# Altium PCB BRD150118.pcbdoc
Units mm, origin at the board's own origin, x right, y up, seen from the top; angles counter-clockwise.
Board outline 49.74 x 49.74 mm, 2 copper layers (Top Layer, Bottom Layer), stack 1.571 mm thick; 34 components, 26 nets, 86 pads, 25 vias.
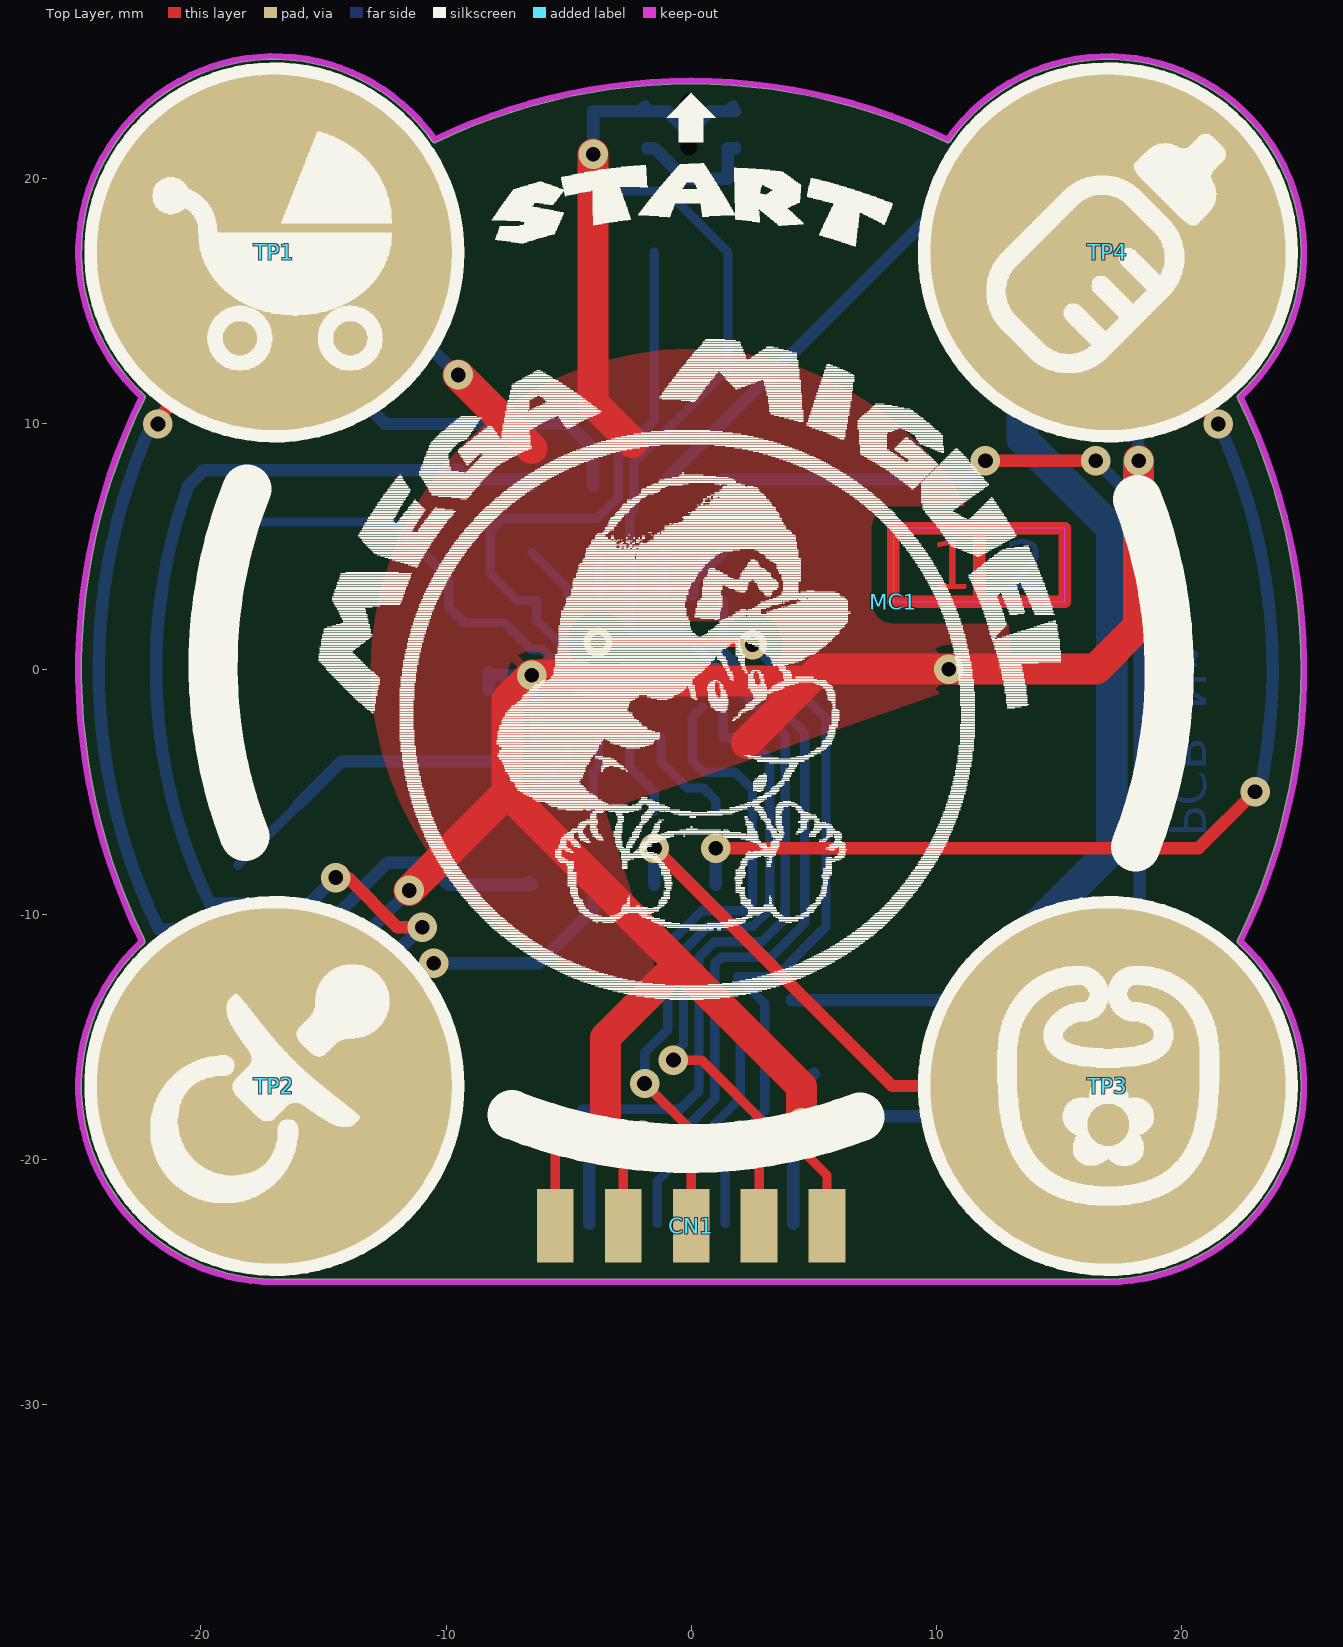
[diagram p0: Top Layer view]
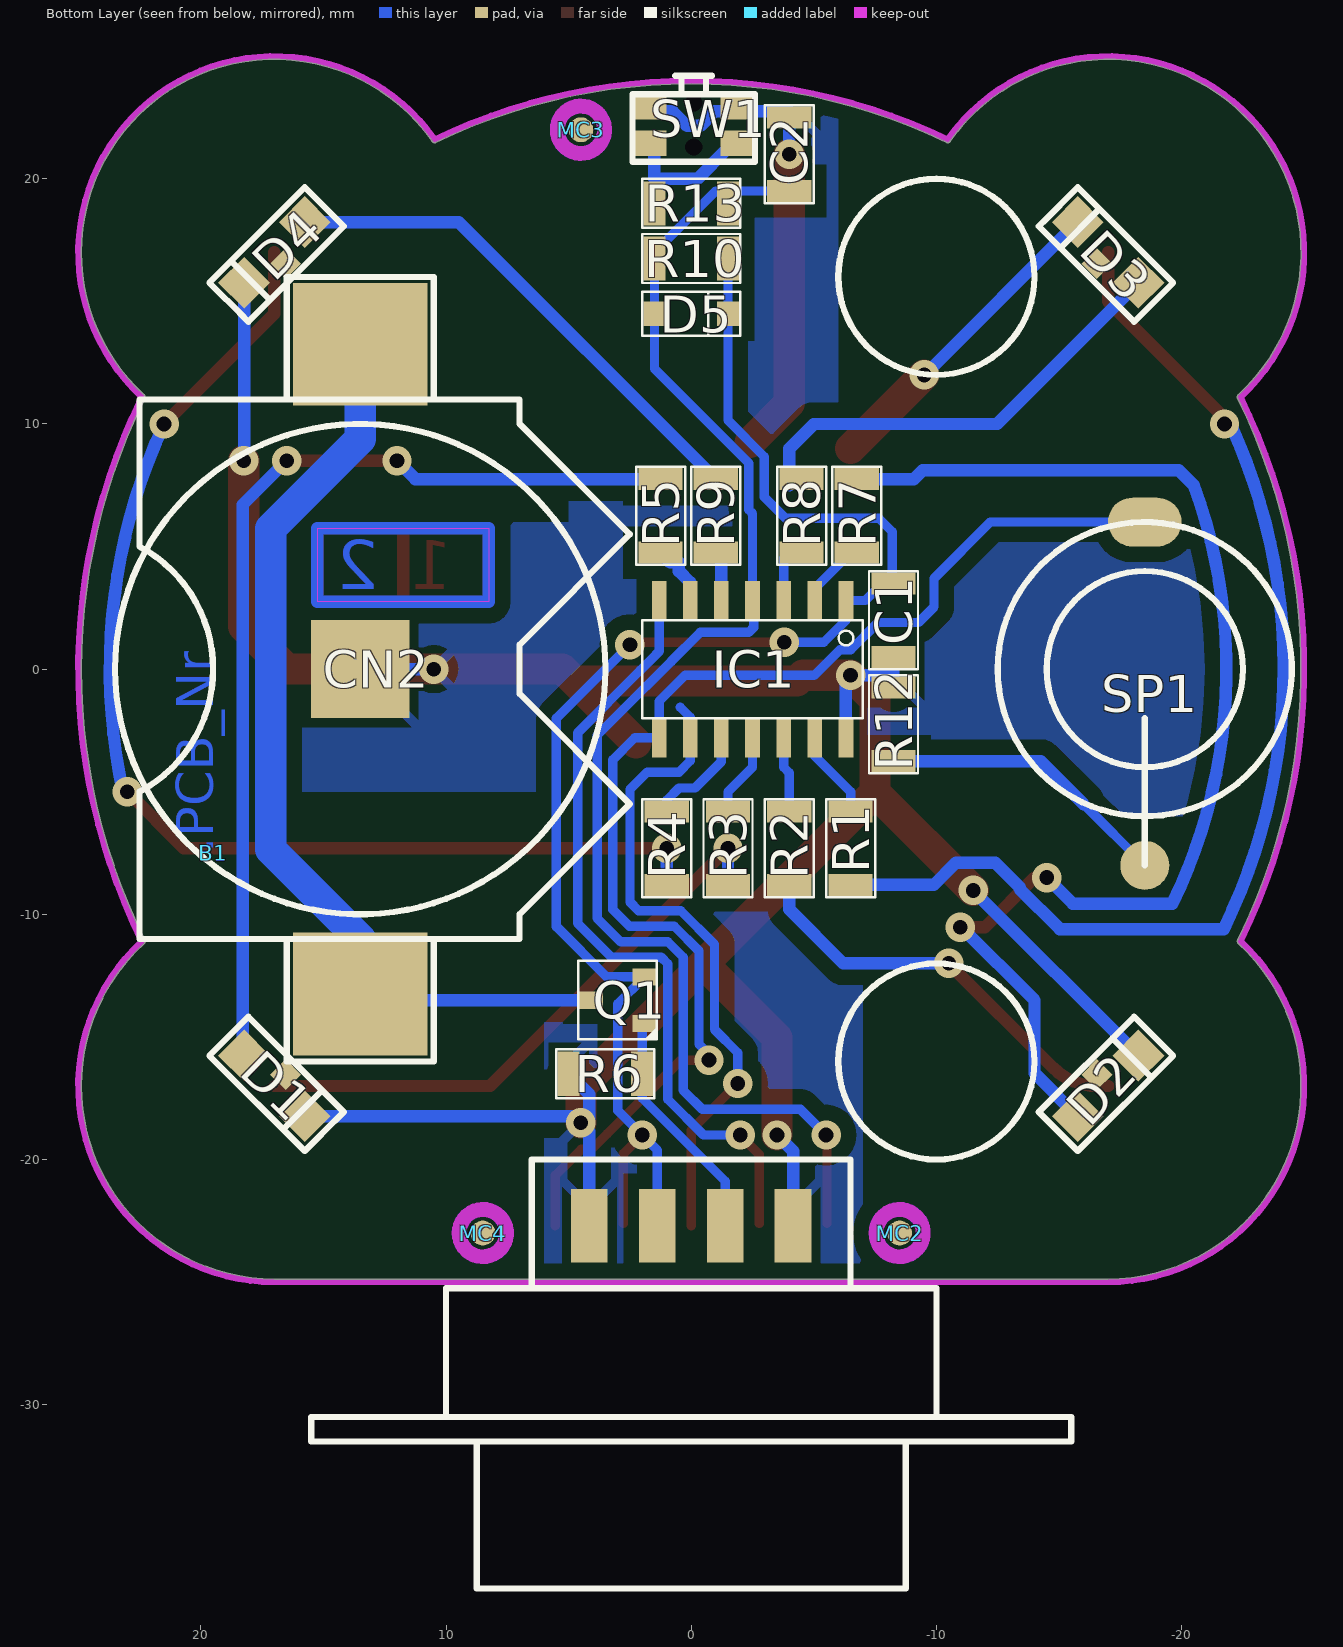
[diagram p1: Bottom Layer view, seen from below]
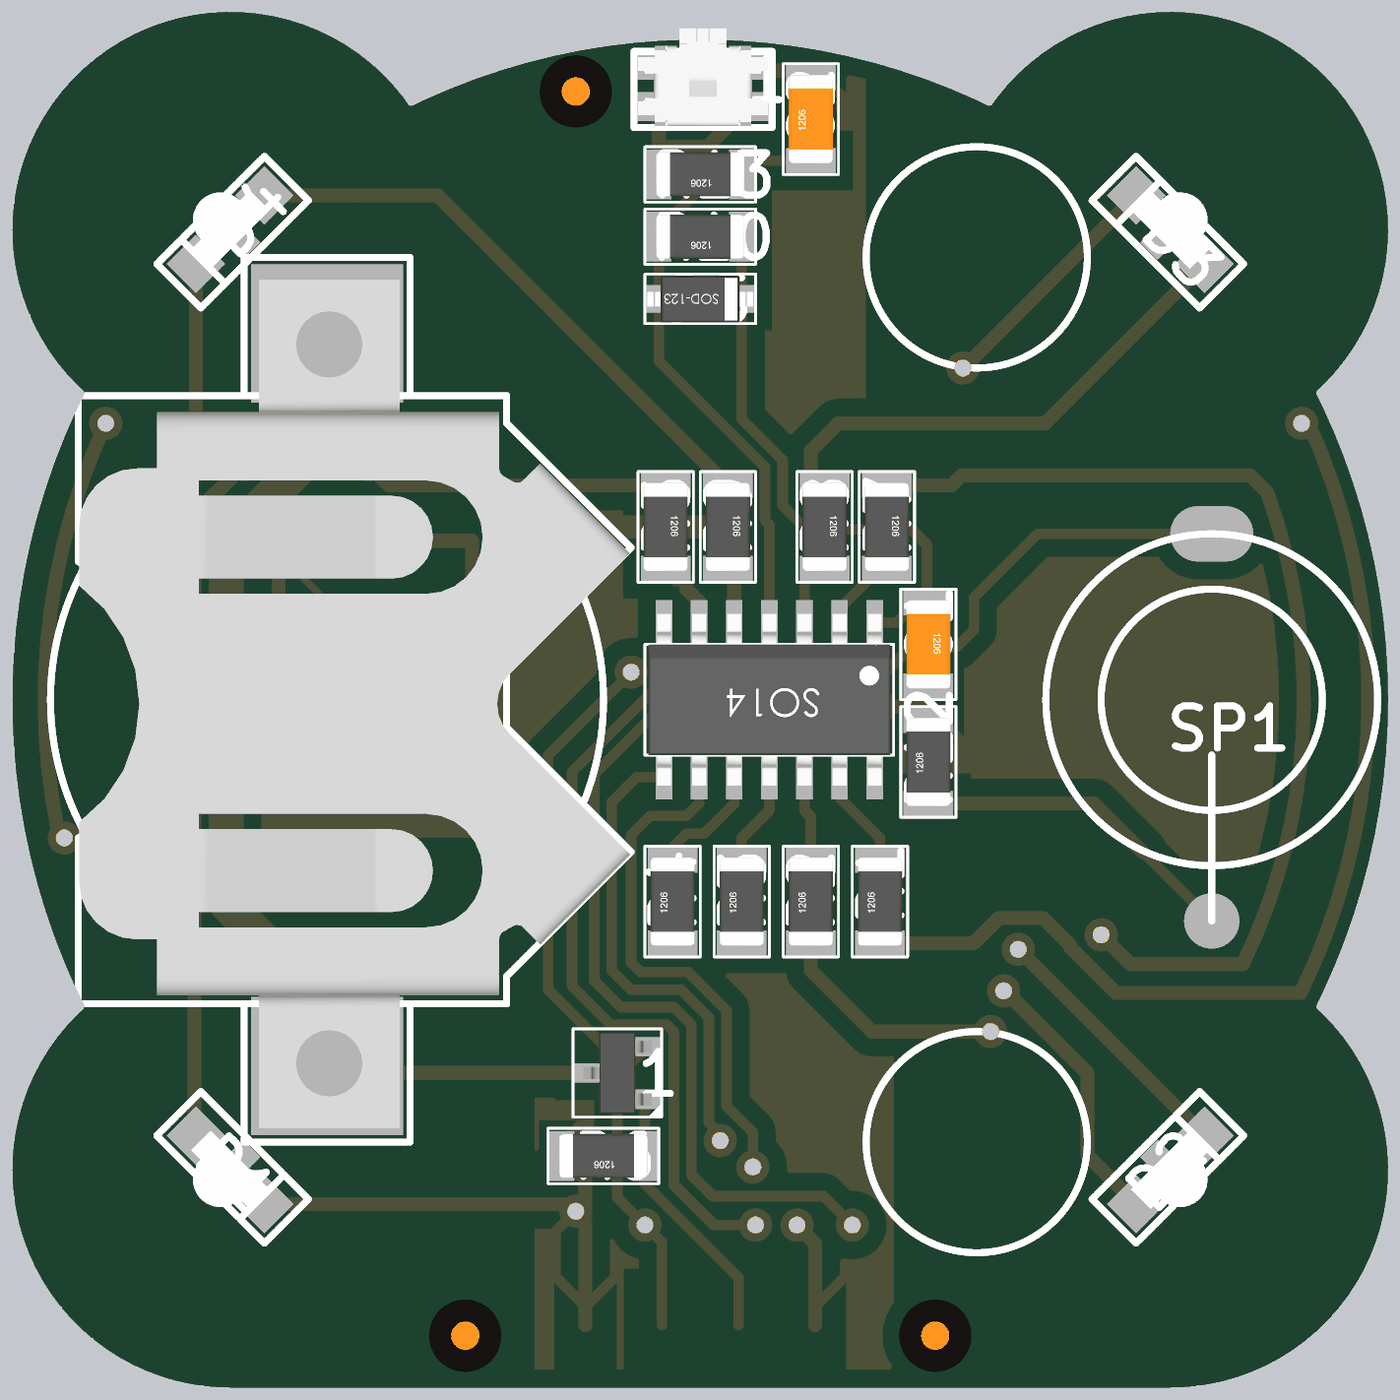
[diagram p2: 3D render of the assembled board from below, using the file's embedded part models]

## Layer stack, top to bottom
Top Solder: solder mask 0.0102, Solder Resist, Dk 3.5
Top Layer: signal copper 0.0356
Dielectric1: dielectric 1.5, FR-4, Dk 4.8
Bottom Layer: signal copper 0.0356
Bottom Solder: solder mask 0.0102, Solder Resist, Dk 3.5

## Board outline
-22.278,-11.103 ccw(c-22.406,-11.103) -22.316,-11.013 ccw(c-22.443,-11.014) -22.329,-10.958 cw(c0,0) -22.286,11.044 ccw(c-22.401,11.1) -22.273,11.1 ccw(c-22.401,11.1) -22.33,11.207 cw(c-17,17) -10.578,21.553 ccw(c-10.46,21.601) -10.404,21.486 cw(c0,0) 10.406,21.485 ccw(c10.462,21.6) 10.583,21.561 cw(c17,17) 24.873,17 cw(c17,17) 22.32,11.197 ccw(c22.406,11.103) 22.316,11.013 ccw(c22.443,11.014) 22.329,10.958 cw(c0,0) 24.873,0 cw(c0,0) 22.286,-11.044 ccw(c22.401,-11.1) 22.33,-11.207 cw(c17,-17) 24.873,-17 cw(c17,-17) 17,-24.873 ccw(c17,-25) 16.999,-24.873 -17,-24.873 cw(c-17,-17) -22.32,-11.197 ccw(c-22.406,-11.103)

## Design rules (kind name [scope] priority, off if disabled: settings)
Clearance SC_SOT23-6 [HasFootprint('SC_SOT23-6') vs HasFootprint('SC_SOT23-6')] p1: gap=0.229
Clearance Clearance_polygons [InPolygon] p2: gap=0.635
Clearance Clearance_All [All] p3: gap=0.254
HoleSize [All] p1: absolutevalues=TRUE maxlimit=3.2 minlimit=0.6 maxpercent=80.000 minpercent=20.000
MinimumAnnularRing [All] p1: minimumring=0.254
MinimumSolderMaskSliver SilkscreenOverComponentPads [All] p2: minsoldermaskwidth=0.254
PlaneClearance [All] p1: clearance=1.27
PolygonConnect [All] p1: connectstyle=Relief reliefconductorwidth=0.381 reliefentries=4 polygonreliefangle="45 Angle" airgapwidth=0.381
RoutingVias [All] p1: holewidth=0.6 width=1.2 viastyle="Through Hole" minholewidth=0.6 minwidth=1.2 maxholewidth=0.6 maxwidth=1.2
SolderMaskExpansion [All] p1: expansion=0
Width [All] p1: maxlimit=1.27 minlimit=0.381 preferedwidth=0.508
28 further rules are at their usual default settings.

## Components (designator, comment, footprint, x,y, rotation, side; value= is the part's Value field where it differs from the comment)
B1 "BRD150118/1" MC_BoardNr 19.5,-7.5 r90 bottom
C1 "YCAM100N" CA_STD1206_H16 -8.25,2 r270 bottom
C2 "YCAM100N" CA_STD1206_H16 -4,21 r90 bottom
CN1 "A-DF 09 LL/Z" CN_SUBD_9P_FEMALE_EDGE 0,-31.5 r0 top
CN2 "S8211-46R" CN_BAT_CLIP_HARWIN_S8211-46R 13.5,0 r90 bottom
D1 "HSME-C110" DI_AVAGO_HSMx-C680 17,-17 r315 bottom
D2 "HSMC-C680" DI_AVAGO_HSMx-C680 -17,-17 r225 bottom
D3 "HSMA-C110" DI_AVAGO_HSMx-C680 -17,17 r135 bottom
D4 "LTST-S321KSKT" DI_AVAGO_HSMx-C680 17,17 r45 bottom
D5 "YDIOBAT46" DI_SOD123 0,14.5 r180 bottom
IC1 "ATTINY84A-SSU" SC_SO14 -2.5,0 r0 bottom
MC1 "MC_2LAYER_INDICATOR" MC_2LAYER_INDICATOR 8.25,2.75 r0 top
MC2 "Fiducial" MC_FIDUCIAL -8.5,-23 r180 bottom
MC3 "Fiducial" MC_FIDUCIAL 4.5,22 r180 bottom
MC4 "Fiducial" MC_FIDUCIAL 8.5,-23 r180 bottom
Q1 "YTRS2035" SC_SOT23_3P 3,-13.5 r90 bottom
R1 "YRES1K" RE_STD1206_H6 -6.5,-7.3 r270 bottom
R2 "YRES1K" RE_STD1206_H6 -4,-7.3 r270 bottom
R3 "YRES1K" RE_STD1206_H6 -1.5,-7.3 r270 bottom
R4 "YRES1K" RE_STD1206_H6 1,-7.3 r270 bottom
R5 "68E/1%" RE_STD1206_H6 1.25,6.25 r90 bottom
R6 "YRES10K" RE_STD1206_H6 3.5,-16.5 r180 bottom
R7 "68E/1%" RE_STD1206_H6 -6.75,6.25 r90 bottom
R8 "68E/1%" RE_STD1206_H6 -4.5,6.25 r90 bottom
R9 "68E/1%" RE_STD1206_H6 -1,6.25 r90 bottom
R10 "YRES10K" RE_STD1206_H6 0,16.75 r180 bottom
R12 "YRES1K" RE_STD1206_H6 -8.25,-2.25 r270 bottom
R13 "YRES330E" RE_STD1206_H6 0,19 r180 bottom
SP1 "7BB-12-9" LS_MURATA_7BB-12-9 -18.5,0 r180 bottom
SW1 "EVQ-P7C01P" CN_PANASONIC_EVQ-P7 -0.1,22.2 r0 bottom
TP1 "Qtouch" SW_ATMEL_QTOUCH_BUTTON -17,17 r0 top
TP2 "Qtouch" SW_ATMEL_QTOUCH_BUTTON -17,-17 r0 top
TP3 "Qtouch" SW_ATMEL_QTOUCH_BUTTON 17,-17 r0 top
TP4 "Qtouch" SW_ATMEL_QTOUCH_BUTTON 17,17 r0 top

## Footprints (in the part's own frame and the unit in brackets; to place one, negate y for a bottom-side part, rotate by r counter-clockwise, add the part's x,y. Pads: shape width x height; smd on the part's side, far side on the other; paste and mask are expansions set on the pad)
CA_STD1206_H16 [mm] "CA_1206"
  rect 0.9x1.8 smd: 1(-1.5,0) 2(1.5,0)
  silkscreen extent -2,-1 2,1, body extent -1.6,-0.8 1.6,0.8, height 1
CN_BAT_CLIP_HARWIN_S8211-46R [mm]
  rect 5x5.5 smd: 1(-13.25,0) 1(13.25,0)
  rect 4x4 smd: 2(0,0)
  silkscreen extent -16,-11 16,10, body extent -15.5,-10.97 15.2,8.97, height 4
CN_PANASONIC_EVQ-P7 [mm]
  rect 1.4x1.05 smd: 1(-1.8,0.75) 1(1.8,0.75) 2(-1.8,-0.75) 2(1.8,-0.75)
  round 0 hole 0.7 unplated: 3(0,-0.9) 3(0,0.9)
  silkscreen extent -2.5,-2 2.5,1.5, body extent -2.35,-2.1 2.35,1.45, height 1.35
CN_SUBD_9P_FEMALE_EDGE [mm]
  rect 1.5x3 smd: 1(5.54,8.8) 2(2.77,8.8) 3(0,8.8) 4(-2.77,8.8) 5(-5.54,8.8)
  rect 1.5x3 smd far side: 6(4.155,8.8) 7(1.385,8.8) 8(-1.385,8.8) 9(-4.155,8.8)
  body extent -15.4,-6 15.41,9.65, height 5.62
DI_AVAGO_HSMx-C680 [mm]
  rect 0.9x0.9 smd: 3(-0.65,0)
  rect 1.5x1.5 smd: A(0,-1.75) C(0,1.75)
  silkscreen extent -1.25,-2.75 1,2.75, body extent -1.1,-2.5 1.5,2.5, height 1
DI_SOD123 [mm] "Standard SOD123 package"
  rect 0.9x1 smd: A(-1.5,0) C(1.5,0)
  silkscreen extent -2,-0.9 2,0.9, body extent -1.93,-0.86 1.92,0.84, height 1.47
LS_MURATA_7BB-12-9 [mm]
  oval 3x2 smd: 1(0,6)
  round 2 smd: 2(0,-8)
  silkscreen extent -6,-8 6,6, body extent -5.99,-6 6,6, height 0.22
MC_2LAYER_INDICATOR [mm] "2 layer indicator"
  Top Layer lines w0.508: 3.5,0 3.5,3 ; 0,0 0,3 6.985,3 6.985,0 0,0
  Bottom Layer lines w0.508: 6.985,0 0,0 ; 6.985,3 0,3 ; 7,0 7,3 ; 0,0 0,3 ; 0,0 0,3
  Keep-Out Layer region: 0,0 6.985,0 6.985,3 0,3
MC_BoardNr [mm] "Board number"
MC_FIDUCIAL [mil] "Fiducial"
  round 40 smd paste-3937.01 mask+31.5: 0(0,0)
  Top Layer keep-out circle w24: c0,0 r38
RE_STD1206_H6 [mm] "RE_1206"
  rect 0.9x1.8 smd: 1(-1.5,0) 2(1.5,0)
  silkscreen extent -2,-1 2,1, body extent -1.6,-0.8 1.6,0.8, height 1.02
SC_SO14 [mm] "IC_SO14"
  rect 0.6x1.6 smd: 1(-3.81,-2.8) 2(-2.54,-2.8) 3(-1.27,-2.8) 4(0,-2.8) 5(1.27,-2.8) 6(2.54,-2.8) 7(3.81,-2.8) 8(3.81,2.8) 9(2.54,2.8) 10(1.27,2.8) 11(0,2.8) 12(-1.27,2.8) 13(-2.54,2.8) 14(-3.81,2.8)
  silkscreen extent -4.5,-2 4.5,2, body extent -4.37,-3.1 4.38,3.1, height 1.77
SC_SOT23_3P [mm] "TR_SOT23_V312"
  rect 0.7x1 smd: 1(-0.95,-1.1) 2(0.95,-1.1) 3(0,1.1)
  silkscreen extent -1.6,-1.6 1.6,1.6, body extent -1.46,-1.25 1.46,1.23, height 1.04
SW_ATMEL_QTOUCH_BUTTON [mm]
  round 15 smd: 1(0,0)
  silkscreen extent -7.5,-7.5 7.5,7.5

## Part data
B1: library part pcb_nr
C1 C2: "100N"
CN1: "Edge mount Connector"
CN2: "Coin cell holder CR2032"
D1: "GREEN"
D2: "RED"
D3: "AMBER"
D4: "YELLOW"
D5: "BAT46"
Q1: "DMP2035"
R1 R2 R3 R4 R12: "1K"
R5 R7 R8 R9: "68E"
R6 R10: "10K"
R13: "330E"
SP1: "12mm piezo"
TP1 TP2 TP3 TP4: library part QtouchButton

## Via types
v1: diameter 1.2, hole 0.6, Top Layer to Bottom Layer, tented both sides, 25 vias

## Nets (pads, with @x,y where several pads share a name; then routed paths per layer and width w, separated by ;. In a path a pad name is that pad's centre, name@x,y a point inside that pad or via, vN(x,y) a via of type N, cw(c..) or ccw(c..) an arc to the next point about the centre after c; other vN are vias at no path point)
/EN_BAT: CN1.8 Q1.1 R6.2 | length 9.6
  Bottom Layer w0.381: CN1.8@-1.385,-22.61 -1.385,-20.885 2,-17.5 R6.2 2,-14.55 Q1.1
/RESET: C2.1 CN1.5 D5.A IC1.4 R10.1 R13.2 | length 58.7
  Top Layer w0.381: CN1.5@-5.54,-22.61 -5.54,-19.04 v1(-5.5,-19)
  Bottom Layer w0.381: v1(-5.5,-19) -4.455,-17.955 -0.455,-17.955 0.32,-17.18 0.32,-15.247 0.32,-11.753 0.953,-11.12 2.88,-11.12 3.835,-10.165 3.835,-2.698 1.816,-0.68 1.804,-0.68 0.82,0.304 0.82,0.316 -0.363,1.5 -2.344,1.5 -2.544,1.7 -2.544,2.756 IC1.4 ; C2.1 -1,19.5 1.5,17 D5.A 1.5,12.25 -2.345,8.406 -2.345,6.5 -2.5,6.345 IC1.4@-2.5,3.05
GND: C1.2 C2.2 CN1.6 CN1.9 CN2.2 D1.C D2.C D3.C D4.C IC1.14 R6.1 R12.1 SW1.2 | length 154.7
  Top Layer w1.27: v1(-11.5,-9.025) -7.5,-5.025 ; v1(-9.5,12) -6.5,9 ; v1(-4,21) -4,10.852 -2.398,9.25 ; v1(-3.5,-19) -3.5,-15.025 -0.5,-12.025 ; 2.25,-3 4.761,-0.489 ; v1(4.5,-18.5) 4.5,-17.025 -0.5,-12.025 ; v1(18.25,8.5) 18.25,1.75 16.5,0 v1(10.5,0) 5.25,0 4.761,-0.489 ; -7.5,-5.025 -0.5,-12.025 ; -7.5,-5.025 -7.5,-1.25 v1(-6.5,-0.25) -4.556,-0.25 -4.317,-0.489 4.761,-0.489
  Bottom Layer w0.508: D2.C v1(-11.5,-9.025) ; D3.C -9.525,12 v1(-9.5,12) ; R12.1@-8.25,-0.86 R12.1 -8.25,-0.125 -8.125,-0.25 v1(-6.5,-0.25) -6.31,-0.44 IC1.14 ; CN1.9@-4.155,-22.61 -4.155,-19.655 v1(-3.5,-19) ; v1(-4,21) C2.2 -4,22.75 SW1.2@-1.7,22.75 ; SW1.2@-1.9,22.95 SW1.2@-1.7,22.75 ; SW1.2@1.7,22.95 1.7,22.85 1.8,22.75 0.758,22.75 0.758,22.745 0.171,22.158 -0.371,22.158 -0.958,22.745 -0.958,22.75 SW1.2@-1.7,22.75 ; CN1.6@4.155,-22.61 4.155,-18.845 v1(4.5,-18.5) ; R6.1 4.155,-17.345 4.155,-18.345 4.31,-18.5 v1(4.5,-18.5) ; v1(10.5,0) CN2.2 ; D1.C 4.763,-18.237 v1(4.5,-18.5) ; D4.C 18.237,8.513 v1(18.25,8.5)
MISO: CN1.1 IC1.8 SP1.1 | length 52.5
  Top Layer w0.381: v1(-0.724,-15.944) 0.422,-15.944 3.42,-18.943 3.42,-18.947 4.053,-19.579 4.479,-19.579 5.54,-20.64 CN1.1
  Bottom Layer w0.381: SP1.1 -12.2,6 -9.9,3.7 -9.9,2.54 -9.265,1.905 -7.62,1.905 -6.51,0.795 -6.067,0.795 -5.023,-0.25 0.25,-0.25 1.31,-1.31 IC1.8 2.3,-2.8 3.2,-3.7 3.2,-9.8 2.515,-10.485 0.69,-10.485 -0.315,-11.49 -0.315,-15.3 -0.724,-15.709 v1(-0.724,-15.944)
MOSI: CN1.4 IC1.7 | length 31.9
  Top Layer w0.381: CN1.4@-2.77,-22.61 -2.77,-19.797 -2,-19.027 v1(-2,-19)
  Bottom Layer w0.381: v1(-2,-19) -0.5,-19 0.955,-17.545 0.955,-14.984 0.955,-12.016 1.216,-11.755 3.245,-11.755 4.635,-10.365 4.635,-2.6 2.079,-0.045 2.067,-0.045 1.455,0.567 1.455,0.579 1.31,0.725 IC1.7
NetCN2_1: CN2.1 Q1.3 | length 39
  Bottom Layer w0.508: Q1.3 13.25,-13.5 CN2.1@13.5,-13.25
  Bottom Layer w1.27: CN2.1@13.5,-13.25 13.5,-11 17.151,-7.349 17.151,5.743 13.5,9.394 CN2.1@13.5,13.25
NetD1_A: D1.A R5.2 | length 40.6
  Top Layer w0.508: v1(12,8.5) v1(16.5,8.5)
  Bottom Layer w0.508: R5.2 11.25,7.75 v1(12,8.5) ; v1(16.5,8.5) 18.294,6.706 18.294,-15.706 D1.A
NetD2_A: D2.A R7.2 | length 51.6
  Top Layer w0.508: v1(-14.5,-8.5) -14,-8.5 -11.972,-10.528 v1(-10.972,-10.528)
  Bottom Layer w0.508: D2.A -14,-16.475 -14,-13.5 -11.028,-10.528 v1(-10.972,-10.528) ; v1(-14.5,-8.5) -15.56,-9.56 -19.624,-9.56 cw(c0,0) -20.5,7.5 -19.892,8.108 -9.44,8.108 -9.082,7.75 R7.2 ; R7.2@-6.75,7.508 R7.2@-6.5,7.508 ; R7.2@-6.5,7.75 R7.2@-6.5,7.758
NetD3_A: D3.A R8.2 | length 18.5
  Bottom Layer w0.508: D3.A -12.475,10 -5,10 -4,9 R8.2@-4,7.5
NetD4_A: D4.A R9.2 | length 21.1
  Bottom Layer w0.508: R9.2 9.487,18.237 D4.A
NetIC1_2: IC1.2 R7.1 | length 2.3
  Bottom Layer w0.381: R7.1@-6.5,4.75 -5.04,3.29 IC1.2@-5.04,3.05
NetIC1_3: IC1.3 R8.1 | length 1.8
  Bottom Layer w0.381: R8.1@-4,4.75 -3.77,4.52 IC1.3@-3.77,3.05
NetIC1_5: IC1.5 R9.1 | length 1.8
  Bottom Layer w0.508: IC1.5@-1.23,3.05 -1.23,4.52 R9.1
NetIC1_6: IC1.6 R5.1 | length 2.4
  Bottom Layer w0.508: IC1.6@0.04,3.05 0.04,3.54 0.502,4.002 0.502,4.358 0.858,4.358 R5.1
NetIC1_10: IC1.10 R4.1 | length 4.3
  Bottom Layer w0.381: IC1.10 -1.23,-3.77 -0.155,-4.845 0.5,-4.845 1,-5.345 R4.1
NetIC1_11: IC1.11 R3.1 | length 3.4
  Bottom Layer w0.381: IC1.11 -2.5,-4 -1.5,-5 R3.1
NetIC1_12: IC1.12 R2.1 | length 3.4
  Bottom Layer w0.381: R2.1@-3.77,-5.57 R2.1 -4,-4.23 -3.77,-4 IC1.12
NetIC1_13: IC1.13 R1.1 | length 3.6
  Bottom Layer w0.381: R1.1 -6.5,-5 -5.04,-3.54 IC1.13
NetR1_2: R1.2 TP1.1 | length 47.2
  Top Layer w0.508: v1(-21.75,10) -21.75,10.25 -17,15 TP1.1
  Bottom Layer w0.508: v1@-22,10 ccw(c0,0) -21.715,-10.605 -15.038,-10.605 -13.392,-8.959 -13.392,-8.892 -12.392,-7.892 -10.8,-7.892 -9.892,-8.8 R1.2 R1.2@-6.608,-8.692
NetR2_2: R2.2 TP2.1 | length 16.9
  Top Layer w0.508: TP2.1 -16.552,-17 ccw(c-16.552,-14.46) -14.756,-16.256 v1(-10.5,-12)
  Bottom Layer w0.508: v1(-10.5,-12) -6.2,-12 -4,-9.8 R2.2
NetR3_2: R3.2 TP3.1 | length 24
  Top Layer w0.508: v1(-1.5,-7.3) 8.2,-17 TP3.1
  Bottom Layer w0.508: R3.2 v1(-1.5,-7.3)
NetR4_2: R4.2 TP4.1 | length 48.7
  Top Layer w0.508: v1(1,-7.3) 20.7,-7.3 v1(23,-5) ; TP4.1 17,14.5 v1(21.5,10)
  Bottom Layer w0.508: R4.2 v1@1,-7.3 ; v1(21.5,10) cw(c0,0) v1@23.171,-5.037
NetR12_2: R12.2 SP1.2 | length 12
  Bottom Layer w0.381: SP1.2 -16,-5.5
  Bottom Layer w0.508: -16,-5.5 -14.25,-3.75 R12.2
NetR13_1: R13.1 SW1.1 | length 5.4
  Bottom Layer w0.508: SW1.1@-1.8,21.25 -1.5,21.25 -0.25,20 1.5,20 1.5,21.25 SW1.1@1.8,21.25
SCK: CN1.3 IC1.9 | length 26.7
  Top Layer w0.381: v1(-1.9,-16.9) 0,-18.8 CN1.3
  Bottom Layer w0.381: v1(-1.9,-16.9) -1.9,-15.643 -0.95,-14.693 -0.95,-11.227 0.427,-9.85 2.15,-9.85 2.5,-9.5 2.5,-4.9 1.8,-4.2 0.5,-4.2 0.04,-3.74 IC1.9 0.04,-1.96 0.445,-1.555
VCC: C1.1 CN1.2 CN1.7 D5.C IC1.1 Q1.2 R10.2 | length 62.8
  Top Layer w0.381: v1(-3.8,1.1) 2.4,1.1 v1(2.5,1) ; v1(2,-19) 2.77,-19.77 CN1.2@2.77,-22.61
  Bottom Layer w0.381: v1(-3.8,1.1) -5.41,1.1 -6.31,2 IC1.1 -7.1,2.8 -8.2,3.9 -8.2,5.6 -7.644,6.155 -3.844,6.155 -2.98,7.02 -2.98,8.669 -1.5,10.148 D5.C R10.2@-1.5,17 ; CN1.7@1.385,-22.61 1.385,-19.615 v1(2,-19) 3,-18 3,-13.65 Q1.2 3.45,-12.55 5.5,-10.5 5.5,-2 v1(2.5,1)
pads on no net: D1.3 D2.3 D3.3 D4.3 MC2.0 MC3.0 MC4.0 SW1.3

## Polygon pours and split planes (outlines as drawn)
GND on Bottom Layer "Top Layer-No Net" (solid, remove dead copper, pour order 2): -6,24 -6,6 -25,6 -25,-6 -7,-6 -7,-25 -6,-25 6,-25 6,-5 25,-5 25,6 5,6 5,24
GND on Top Layer "Top Layer-No Net" (solid, pour order 6): -1.204,-13.004 cw(c0,0) 13.06,0 -3.5,-5.75

## Keep-outs
Keep-Out Layer:
  lines w0.254: -22.443,-11.014 cw(c0,0) -22.401,11.1 ; -22.406,-11.103 ccw(c-17,-17) -17,-25 17,-25 ccw(c17,-17) 22.406,-11.103 ; -22.406,11.103 cw(c-17,17) -10.469,21.62 ; -10.46,21.601 cw(c0,0) 10.462,21.6 ; 10.477,21.632 cw(c17,17) 22.406,11.103 ; 22.401,-11.1 ccw(c0,0) 22.443,11.014

## Silkscreen, mask and mechanical layers (free items; w line width, h text height)
Top Overlay:
  drawing of 7469 lines, arcs and shapes, not listed
Bottom Overlay:
  circle w0.254: c-10,-16 r4
  circle w0.254: c-10,16 r4
Mechanical 4:
  lines w0.127: -89.92,-95 -95,-95 ; -59.44,45.97 -89.92,45.97 ; -46.74,-95 -46.74,-89.92 ; -46.74,45.97 -46.74,51.05 ; -21.34,-82.275 92.96,-82.275 ; -21.34,-74.655 92.96,-74.655 ; -21.34,-67.035 16.76,-67.035 ; 1.52,-95 1.52,-89.92 ; 1.52,45.97 1.52,51.05 ; 16.76,-89.895 16.76,-74.655 16.76,-59.415 ; 49.78,-95 49.78,-89.92 ; 49.78,45.97 49.78,51.05 ; 70.1,-89.895 70.1,-74.655 ; 92.96,-95 98.04,-95 ; -95,-95 98.04,-95 ; -95,-95 -95,51.05 98.04,51.05 98.04,-95 ; -89.92,45.97 92.96,45.97 92.96,-89.92 -89.92,-89.92 -89.92,45.97 ; -21.34,-89.895 -21.34,-59.415 ; -21.34,-89.895 92.96,-89.895 92.96,-59.415 16.76,-59.415 ; -21.34,-89.895 -56.9,-89.895 -56.9,-59.415 -21.34,-59.415 ; -21.34,-59.415 16.76,-59.415 ; -95,-21.975 -89.92,-21.975 -95,-21.975 ; 92.96,-21.975 98.04,-21.975 92.96,-21.975
  text "A" at 73.529,48.993 h1.78 r90
  text "D" at -69.981,47.723 h1.78 r270
  text "C" at -22.356,47.723 h1.78 r270
  text "B" at 23.364,47.723 h1.78 r270
  text "2" at -91.571,15.338 h1.78 r90
  text "2" at 96.389,15.338 h1.78 r90
  text "1" at -91.571,-57.687 h1.78 r90
  text "1" at 96.389,-57.687 h1.78 r90
  text "ENGINEER:" at -20.07,-61.955 h1.14
  text "TITLE:" at 18.03,-61.955 h1.14
  text ".ProjectName" at 24.38,-68.762 h2.5
  text "PCB DESIGNER:" at -20.07,-69.448 h1.14
  text ".DrawnByX" at -7.243,-72.419 h2.5
  text "DATE:" at -20.07,-77.195 h1.14
  text "PART NO.:" at 18.03,-77.195 h1.14
  text "REV:" at 71.37,-77.195 h1.14
  text ".PRINT_DATE" at -18.8,-80.243 h1.78
  text ".RevisionNR" at 71.421,-80.573 h2.5
  text "FILE NAME:" at -20.07,-84.815 h1.14
  text "DWG NO:" at 18.03,-84.815 h1.14
  text "SCALE:" at 71.37,-84.815 h1.14
  text ".PCB_Nr" at 26.996,-87.253 h2.5
  text ".PCB_FILE_NAME_NO_PATH" at -18.8,-87.863 h1.78
  text "D" at -72.978,-93.095 h1.78 r270
  text "C" at -24.972,-93.095 h1.78 r270
  text "B" at 23.542,-93.095 h1.78 r270
  text "A" at 71.599,-93.095 h1.78 r270
Mechanical 5:
  lines w0.127: -89.92,-95 -95,-95 ; -89.92,-82.275 24.38,-82.275 ; -89.92,-74.655 24.38,-74.655 ; -67.06,-89.895 -67.06,-74.655 ; -46.74,-95 -46.74,-89.92 ; -46.74,45.97 -46.74,51.05 ; -13.72,-89.895 -13.72,-74.655 -13.72,-59.415 ; -13.72,-67.035 24.38,-67.035 ; 1.52,-95 1.52,-89.92 ; 1.52,45.97 1.52,51.05 ; 49.78,-95 49.78,-89.92 ; 49.78,45.97 49.78,51.05 ; 62.48,45.97 92.96,45.97 ; 92.96,-95 98.04,-95 ; -95,-95 98.04,-95 ; -95,-95 -95,51.05 98.04,51.05 98.04,-95 ; -13.72,-59.415 -89.92,-59.415 -89.92,-89.895 24.38,-89.895 ; -13.72,-59.415 24.38,-59.415 ; 24.38,-89.895 24.38,-59.415 ; 24.38,-89.895 59.94,-89.895 59.94,-59.415 24.38,-59.415 ; 92.96,45.97 -89.92,45.97 -89.92,-89.92 92.96,-89.92 92.96,45.97 ; -95,-21.975 -89.92,-21.975 -95,-21.975 ; 92.96,-21.975 98.04,-21.975 92.96,-21.975
  text "A" at -69.981,48.993 h1.78 r270
  text "B" at -22.356,48.993 h1.78 r270
  text "C" at 23.364,48.993 h1.78 r270
  text "D" at 71.624,48.993 h1.78 r270
  text "2" at -93.476,15.338 h1.78 r270
  text "2" at 94.484,15.338 h1.78 r270
  text "1" at -93.476,-57.687 h1.78 r270
  text "1" at 94.484,-57.687 h1.78 r270
  text "TITLE:" at -14.99,-61.955 h1.14
  text "ENGINEER:" at 23.11,-61.955 h1.14
  text ".ProjectName" at -20.451,-68.559 h2.5
  text "PCB DESIGNER:" at 23.11,-69.448 h1.14
  text ".DrawnByX" at 10.664,-72.496 h2.5
  text "REV:" at -68.33,-77.195 h1.14
  text "PART NO.:" at -14.99,-77.195 h1.14
  text "DATE:" at 23.11,-77.195 h1.14
  text ".PRINT_DATE" at 21.84,-80.243 h1.78
  text ".RevisionNR" at -67.517,-81.64 h2.5
  text "SCALE:" at -68.33,-84.815 h1.14
  text "DWG NO:" at -14.99,-84.815 h1.14
  text "FILE NAME:" at 23.11,-84.815 h1.14
  text ".PCB_FILE_NAME_NO_PATH" at 21.84,-87.863 h1.78
  text ".PCB_Nr" at -22.737,-88.117 h2.5
  text "B" at -24.896,-91.977 h1.78 r270
  text "C" at 23.364,-91.977 h1.78 r270
  text "D" at 71.624,-91.977 h1.78 r270
  text "A" at -73.156,-93.247 h1.78 r270
Mechanical 8:
  lines w0.254: -22.443,-11.014 cw(c0,0) -22.401,11.1 ; -22.406,-11.103 ccw(c-17,-17) -17,-25 17,-25 ccw(c17,-17) 22.406,-11.103 ; -22.406,11.103 cw(c-17,17) -10.469,21.62 ; -10.46,21.601 cw(c0,0) 10.462,21.6 ; 10.477,21.632 cw(c17,17) 22.406,11.103 ; 22.401,-11.1 ccw(c0,0) 22.443,11.014
Drill Drawing:
  lines w0.203: -87.38,-54.36 -87.38,-56.9 -84.84,-56.9 ; -87.38,42.16 -87.38,44.7 -84.84,44.7 ; 87.88,-56.9 90.42,-56.9 90.42,-54.36 ; 87.88,44.7 90.42,44.7 90.42,42.16
  text ".Legend" at -83,-43.5 h1.52

## Text inside footprints (layer, text, board x,y; h text height)
MC1: Bottom Layer "2" at 12.75,3.25 h2; Top Layer "1" at 9.75,3.25 h2